# Altium PCB AEKISO60.PcbDoc (part 2 of 2)
Units mm, origin at the board's own origin, x right, y up, seen from the top; angles counter-clockwise.
Board outline 284.73 x 94.2 mm, 2 copper layers (Component Side, Bottom Layer), stack 1.571 mm thick; 190 components, 126 nets, 646 pads, 163 vias.
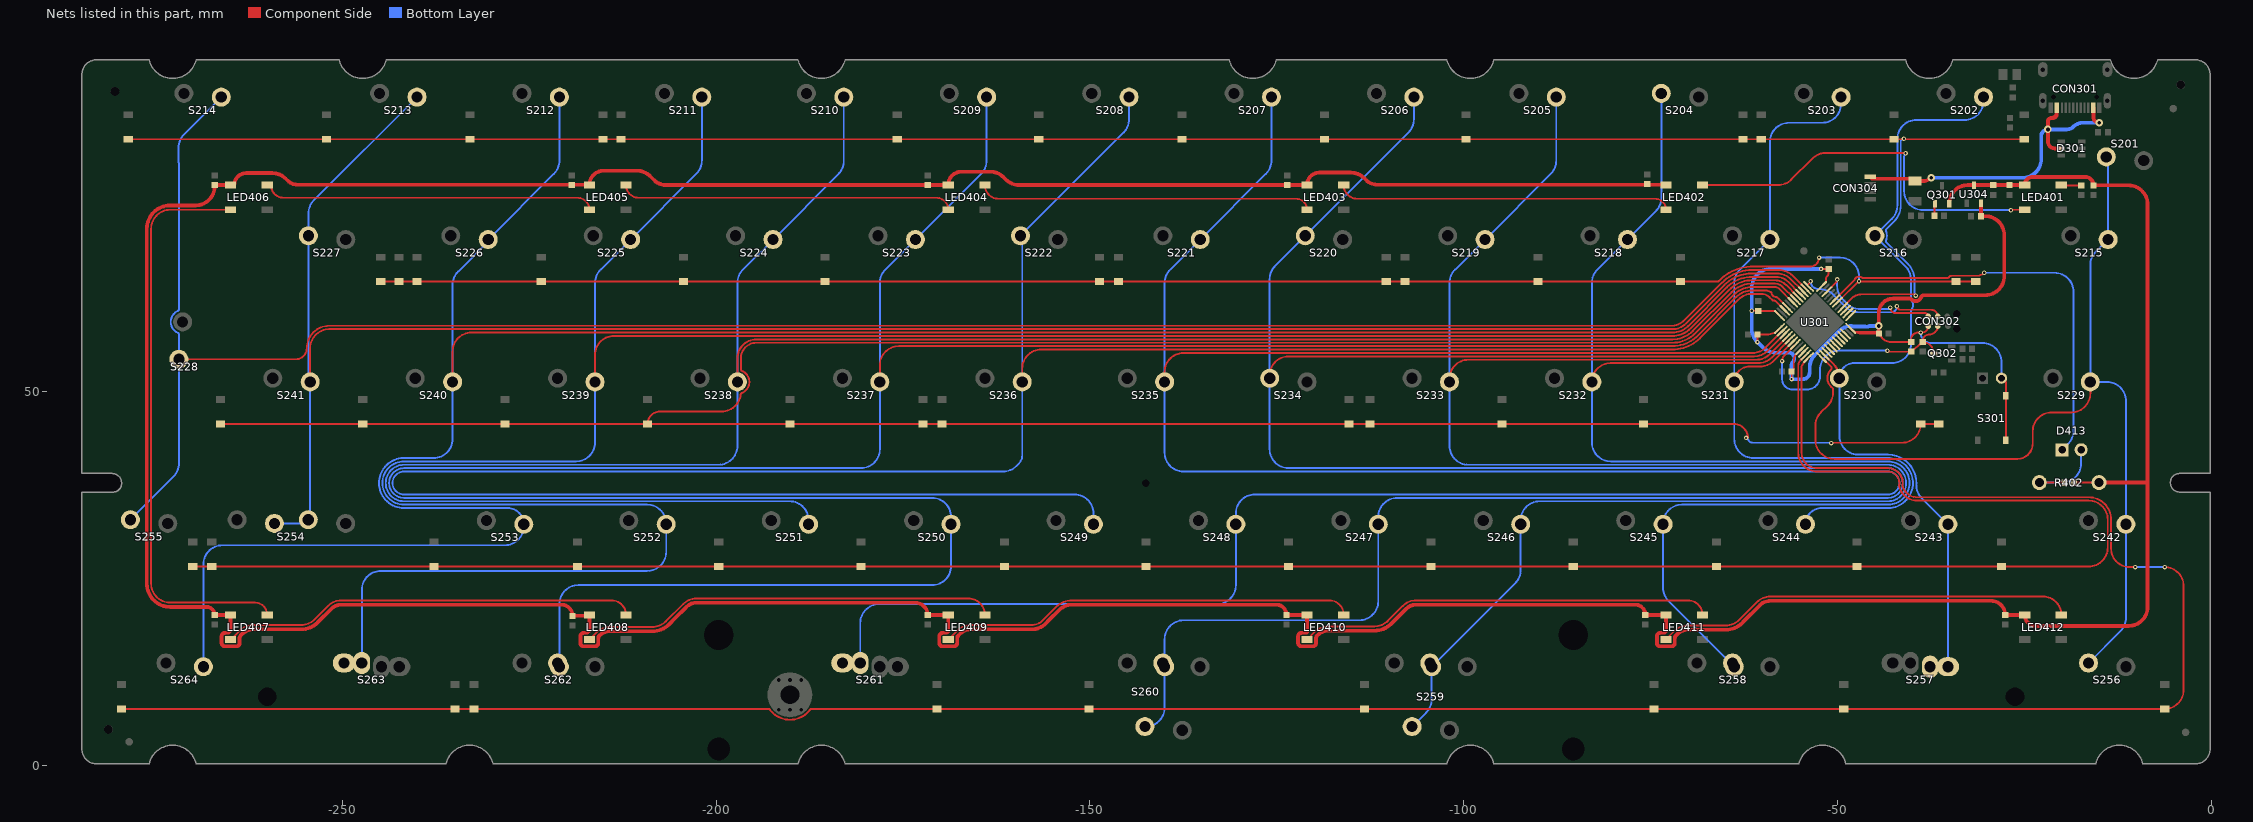
[diagram p2: the nets of this part, all layers, seen from the top]

## Via types
v1: diameter 0.6, hole 0.3, Component Side to Bottom Layer, tented both sides, 133 vias
v2: diameter 0.6, hole 0.3, Component Side to Bottom Layer, tented bottom, 25 vias
v3: diameter 1, hole 0.5, Component Side to Bottom Layer, tented both sides, 5 vias

## Nets (pads, with @x,y where several pads share a name; then routed paths per layer and width w, separated by ;. In a path a pad name is that pad's centre, name@x,y a point inside that pad or via, vN(x,y) a via of type N, cw(c..) or ccw(c..) an arc to the next point about the centre after c; other vN are vias at no path point) (continued)
NetD413_1: D413.1 R402.1 | length 12.2
  Component Side w0.254: R402.1@-23,37.846 R402.1@-19.65,37.846
  Bottom Layer w0.254: R402.1@-23,37.846 -19.945,37.846 ccw(c-19.945,40.386) -17.405,40.386 D413.1@-17.405,42.235
NetLED401_2: LED401.2 LED402.4 | length 51.2
  Component Side w0.254: LED402.4@-68.049,77.65 -57.949,77.65 ccw(c-57.949,80.19) -56.153,78.394 -53.423,81.124 cw(c-51.218,78.921) -52.278,81.852 cw(c-51.916,80.838) -51.913,81.915 v1(-40.894,81.915) ; v1@-26.598,74.35 LED401.2@-24.95,74.35
  Bottom Layer w0.254: v1(-40.894,81.915) ccw(c-40.457,81.478) -41.075,81.478 -41.075,76.835 ccw(c-38.535,76.835) -38.535,74.295 v1(-26.797,74.295)
NetLED401_4: LED401.4 R401.2 | length 2.7
  Component Side w0.254: LED401.4@-20.05,77.65 ccw(c-20.011,77.65) -20.011,77.612 R401.2@-17.399,77.612
NetLED402_2: LED402.2 LED403.4 | length 45
  Component Side w0.254: LED403.4@-116.049,77.65 ccw(c-114.218,77.65) -114.218,75.819 -74.418,75.819 cw(c-74.418,74.35) LED402.2@-72.949,74.35
NetLED403_2: LED403.2 LED404.4 | length 45
  Component Side w0.254: LED404.4@-164.049,77.65 ccw(c-162.218,77.65) -162.218,75.819 -122.418,75.819 cw(c-122.418,74.35) LED403.2@-120.949,74.35
NetLED404_2: LED404.2 LED405.4 | length 45
  Component Side w0.254: LED405.4@-212.049,77.65 ccw(c-210.346,77.65) -210.346,75.946 -170.545,75.946 cw(c-170.545,74.35) LED404.2@-168.949,74.35
NetLED405_2: LED405.2 LED406.4 | length 44.5
  Component Side w0.254: LED406.4@-259.55,77.65 ccw(c-257.846,77.65) -257.846,75.946 -218.545,75.946 cw(c-218.545,74.35) LED405.2@-216.95,74.35
NetLED406_2: LED406.2 LED407.4 | length 78
  Component Side w0.254: LED406.2@-264.45,74.35 LED406.2@-264.949,74.35 -273.029,74.35 ccw(c-273.029,71.81) -275.569,71.81 -275.569,24.328 ccw(c-273.029,24.328) -273.029,21.788 -261.687,21.788 cw(c-261.687,20.15) LED407.4@-260.049,20.15
NetLED407_2: LED407.2 LED408.4 | length 55.9
  Component Side w0.254: LED407.2@-264.949,16.85 -263.747,18.052 cw(c-261.951,16.256) -261.951,18.796 -255.51,18.796 ccw(c-255.51,21.336) -253.714,19.54 -251.899,21.354 cw(c-250.103,19.558) -250.103,22.098 -213.997,22.098 cw(c-213.997,20.15) LED408.4@-212.049,20.15
NetLED408_2: LED408.2 LED409.4 | length 56.1
  Component Side w0.254: LED408.2@-216.95,16.85 -216.005,17.795 cw(c-214.209,15.999) -214.209,18.539 -212.219,18.539 cw(c-212.076,15.548) -212.076,18.542 -208.52,18.542 ccw(c-208.52,21.082) -206.724,19.286 -204.401,21.608 ; -204.401,21.609 cw(c-204.223,21.427) -204.375,21.631 -203.985,21.922 ; -203.985,21.922 cw(c-202.692,20.193) -202.692,22.352 -166.251,22.352 cw(c-166.251,20.15) LED409.4@-164.049,20.15
NetLED409_2: LED409.2 LED410.4 | length 55.9
  Component Side w0.254: LED409.2@-168.949,16.85 -167.747,18.052 cw(c-165.951,16.256) -165.951,18.796 -157.793,18.796 ccw(c-157.793,20.882) -156.953,18.973 ccw(c-157.793,20.882) -156.319,19.406 -155.648,20.077 -154.504,21.22 cw(c-152.386,19.104) -154.053,21.591 cw(c-152.386,19.104) -152.386,22.098 -117.997,22.098 cw(c-117.997,20.15) LED410.4@-116.049,20.15
NetLED410_2: LED410.2 LED411.4 | length 55.9
  Component Side w0.254: LED410.2@-120.949,16.85 -119.93,17.869 cw(c-118.134,16.073) -118.134,18.613 -111.929,18.613 ccw(c-111.929,21.153) -110.133,19.357 -108.135,21.354 cw(c-106.339,19.558) -106.339,22.098 -69.997,22.098 cw(c-69.997,20.15) LED411.4@-68.049,20.15
NetLED411_2: LED411.2 LED412.4 | length 56.4
  Component Side w0.254: LED411.2@-72.949,16.85 -71.803,17.996 cw(c-70.007,16.2) -70.007,18.74 -64.939,18.74 ccw(c-64.939,21.28) -63.143,19.484 -60.764,21.862 cw(c-58.968,20.066) -58.968,22.606 -22.505,22.606 cw(c-22.505,20.15) LED412.4@-20.05,20.15
NetQ301_1: Q301.1 R307.1 | length 1.6
  Component Side w0.254: R307.1@-37.029,73.561 -37.029,74.96 cw(c-36.753,74.96) Q301.1@-36.948,75.155
NRST: C310.1 CON302.3 Q302.3 R303.2 U301.7 | length 34.2
  Component Side w0.254: v1(-57.404,54.102) cw(c-56.302,54.102) -57.081,54.881 U301.7@-55.797,56.166 ; v1(-43.307,55.499) ccw(c-42.964,55.842) -42.964,55.357 R303.2@-40.132,55.357 -39.834,55.63 -38.906,56.384 C310.1@-38.608,56.657 ; Q302.3@-37.141,55.118 -37.141,55.19 ccw(c-38.608,55.19) C310.1@-38.608,56.657 ; CON302.3@-36.576,58.801 cw(c-37.719,58.801) -37.719,57.658 ccw(c-37.719,56.769) -38.608,56.769 C310.1@-38.608,56.657
  Bottom Layer w0.254: v1(-57.404,54.102) -57.404,51.689 ccw(c-56.007,51.689) -56.007,50.292 -54.102,50.292 ccw(c-54.102,52.07) -52.324,52.07 -52.324,52.959 cw(c-49.784,52.959) -49.784,55.499 v1(-43.307,55.499)
PA0: U301.10
PA1: D242.2 D243.2 D244.2 D245.2 D246.2 D247.2 D248.2 D249.2 D250.2 D251.2 D252.2 D253.2 D254.2 D255.2 U301.11 | length 321.1
  Component Side w0.254: D255.2@-270.002,26.63 D254.2@-267.462,26.63 D253.2@-237.744,26.63 D252.2@-218.567,26.63 D251.2@-199.644,26.63 D250.2@-180.594,26.63 D249.2@-161.417,26.63 D248.2@-142.494,26.63 D247.2@-123.444,26.63 D246.2@-104.394,26.63 D245.2@-85.344,26.63 D244.2@-66.167,26.63 D243.2@-47.371,26.63 D242.2@-28.067,26.63 -16.383,26.63 ccw(c-16.383,29.17) -13.843,29.17 -13.843,32.893 ccw(c-16.383,32.893) -16.383,35.433 -39.354,35.433 cw(c-39.354,37.859) -41.743,37.437 cw(c-41.492,37.479) -41.742,37.524 ccw(c-43.25,37.79) -41.721,37.862 ccw(c-43.25,37.79) -43.25,39.321 -52.705,39.321 cw(c-52.705,41.861) -55.245,41.861 -55.245,53.469 cw(c-54.231,53.469) -54.949,54.185 ; -54.948,54.186 U301.11@-54.383,54.751
PA2: D256.2 D257.2 D258.2 D259.2 D260.2 D261.2 D262.2 D263.2 D264.2 U301.12 | length 367.9
  Component Side w0.254: D264.2@-279.527,7.58 D263.2@-234.95,7.58 D262.2@-232.41,7.58 -193.001,7.58 cw(c-193.002,7.326) -192.798,7.477 ccw(c-190.119,9.45) -187.441,7.476 cw(c-187.236,7.326) -187.237,7.58 D261.2@-170.434,7.58 D260.2@-150.114,7.58 D259.2@-113.284,7.58 D258.2@-74.549,7.58 D257.2@-49.149,7.58 D256.2@-6.223,7.58 ccw(c-6.223,10.12) -3.683,10.12 -3.683,24.003 ccw(c-6.223,24.003) v1(-6.223,26.543) ; U301.12@-54.029,54.398 -54.405,54.022 cw(c-54.638,54.123) -54.438,53.966 ccw(c-52.451,52.384) -54.77,53.42 ccw(c-54.537,53.319) -54.791,53.32 -54.791,41.861 ccw(c-52.705,41.861) -52.705,39.775 -43.25,39.775 cw(c-43.25,37.79) -41.283,37.522 ccw(c-41.031,37.489) -41.28,37.439 ccw(c-39.354,37.859) -39.354,35.887 -16.383,35.887 cw(c-16.383,32.893) -13.389,32.893 -13.389,29.01 ccw(c-10.922,29.01) -10.922,26.543 v1(-10.16,26.543)
  Bottom Layer w0.254: v1(-10.16,26.543) v1(-6.223,26.543)
PA3: S201.2 S215.1 S229.1 S242.1 S256.1 U301.13 | length 132.3
  Component Side w0.254: U301.13@-51.943,54.398 -51.926,54.381 -51.92,54.388 cw(c-52.032,54.16) -51.852,54.339 -51.52,54.008 ccw(c-51.183,54.345) -51.425,53.934 cw(c-51.555,53.716) -51.376,53.896 -50.83,53.35 cw(c-51.01,53.171) -50.836,52.986 ccw(c-49.75,51.815) -51.197,51.14 ccw(c-49.75,51.815) -50.686,50.521 cw(c-50.836,50.316) -50.582,50.317 -50.582,49.886 cw(c-53.061,49.886) -51.308,48.133 -52.215,47.226 ccw(c-50.419,45.43) -52.959,45.43 -52.959,43.561 ccw(c-50.419,43.561) -50.419,41.021 -25.908,41.021 ccw(c-25.908,43.053) -23.876,43.053 -23.876,44.704 cw(c-21.336,44.704) -21.336,47.244 -18.715,47.244 ccw(c-18.715,49.784) -16.175,49.784 S229.1@-16.175,51.315
  Bottom Layer w0.254: S256.1@-16.412,13.715 -12.156,17.972 ccw(c-13.952,19.768) -11.412,19.768 S242.1@-11.412,32.265 -11.412,48.775 ccw(c-13.952,48.775) -13.952,51.315 S229.1@-16.175,51.315 -16.175,66.931 cw(c-13.635,66.931) -15.431,68.727 S215.1@-13.793,70.365 -13.793,80.84 ccw(c-14.606,80.84) S201.2@-14.031,81.415
PA4: S202.2 S216.2 S230.2 S243.2 S257.1 U301.14 | length 109.1
  Component Side w0.254: U301.14@-51.589,54.751 -50.494,53.656 cw(c-52.29,51.86) -50.187,53.285 cw(c-52.29,51.86) -49.75,51.86 S230.2@-49.75,51.815
  Bottom Layer w0.254: -40.161,62.935 ccw(c-39.537,62.873) -40.162,62.933 ccw(c-39.537,62.873) -40.161,62.811 -40.161,62.419 ccw(c-39.907,62.42) -40.112,62.269 cw(c-41.021,61.595) -40.111,60.922 ccw(c-39.906,60.772) -40.16,60.773 -40.16,56.388 cw(c-42.7,56.388) -42.7,53.848 -47.717,53.848 ccw(c-47.717,51.815) S230.2@-49.75,51.815 -49.75,44.131 ccw(c-47.21,44.131) -49.674,43.513 ccw(c-47.21,44.131) -47.828,41.667 ccw(c-47.21,44.131) -47.21,41.591 -44.069,41.591 -43.25,41.591 cw(c-43.25,37.79) -43.246,41.591 cw(c-43.25,37.79) -41.516,41.173 cw(c-43.25,37.79) -40.032,39.814 cw(c-43.25,37.79) -39.449,37.794 cw(c-43.25,37.79) -39.449,37.786 cw(c-43.25,37.79) -39.454,37.603 ccw(c-39.2,37.591) -39.449,37.541 ccw(c-36.909,37.541) -38.705,35.745 S243.2@-35.225,32.265 S257.1@-35.224,13.215 ; -40.16,62.957 -40.16,64.986 ccw(c-42.7,64.986) -40.904,66.782 S216.2@-44.987,70.865 -42.727,73.125 ccw(c-44.523,74.921) -42.168,73.969 ccw(c-44.523,74.921) -41.983,74.921 -41.983,83.82 cw(c-39.443,83.82) -39.443,86.36 -33.002,86.36 ccw(c-33.002,88.9) -30.462,88.9 S202.2@-30.462,89.415
PA5: U301.15
PA6: U301.16
PA7: U301.17
PA9: D215.2 D216.2 D217.2 D218.2 D219.2 D220.2 D221.2 D222.2 D223.2 D224.2 D225.2 D226.2 D227.2 D228.2 U301.30 | length 220.8
  Component Side w0.254: D228.2@-244.856,64.73 D227.2@-242.443,64.73 D226.2@-240.03,64.73 D225.2@-223.393,64.73 D224.2@-204.343,64.73 D223.2@-185.42,64.73 D222.2@-148.717,64.73 D221.2@-146.177,64.73 D220.2@-110.363,64.73 D219.2@-107.823,64.73 D218.2@-90.043,64.73 -71.386,64.73 ccw(c-71.386,65.165) -71.096,64.841 ccw(c-71.386,65.165) -71.006,64.953 cw(c-72.929,64.73) D217.2@-70.993,64.73 -66.065,64.73 ccw(c-66.065,64.984) -65.886,64.804 -65.772,64.918 cw(c-61.402,60.56) -64.191,66.066 cw(c-61.402,60.56) -62.375,66.655 ccw(c-62.416,66.905) -62.365,66.657 cw(c-61.648,63.284) -61.648,66.732 -53.664,66.732 ccw(c-53.664,67.945) v1(-52.451,67.945) ; U301.30@-49.822,62.141 -49.809,62.141 -47.18,64.77 v1(-47.117,64.77) -34.203,64.77 D216.2@-34.163,64.73 D215.2@-31.496,64.73
  Bottom Layer w0.254: v1(-52.451,67.945) -49.657,67.945 cw(c-49.657,65.405) -47.117,65.405 v1(-47.117,64.77)
PA10: D413.2 U301.31 | length 56.3
  Component Side w0.254: U301.31@-50.175,62.494 -47.784,64.886 ccw(c-47.964,65.065) -47.731,64.964 -47.689,65.06 cw(c-47.456,64.958) -47.637,65.137 ccw(c-47.788,65.341) -47.595,65.176 cw(c-47.117,64.77) -47.561,65.213 cw(c-47.117,64.77) -46.743,65.273 ccw(c-46.593,65.478) -46.594,65.224 -35.274,65.224 ccw(c-35.275,65.478) -35.056,65.349 cw(c-34.773,65.185) -34.773,65.512 -32.135,65.512 cw(c-32.135,65.147) -32.125,65.512 ccw(c-32.12,65.766) -32.113,65.512 cw(c-32.106,65.185) -32.106,65.512 -31.321,65.512 ccw(c-31.321,66.881) -30.697,65.662 ccw(c-31.321,66.881) v1(-30.353,65.913)
  Bottom Layer w0.254: v1(-30.353,65.913) -20.955,65.913 cw(c-20.955,63.373) -18.415,63.373 -18.415,44.817 cw(c-20.955,44.817) -19.159,43.021 D413.2@-19.945,42.235
PA15: S214.2 S228.2 S255.2 U301.38 | length 285.9
  Component Side w0.254: S228.2@-271.861,54.345 -256.238,54.345 ccw(c-256.238,55.829) -254.754,55.829 cw(c-251.76,55.829) -251.76,58.823 -72.277,58.823 ccw(c-72.277,61.363) -70.481,59.567 -65.451,64.597 cw(c-61.402,60.56) -65.439,64.609 cw(c-61.402,60.56) -62.292,66.208 ccw(c-62.333,66.459) -62.281,66.21 cw(c-61.648,63.284) -61.648,66.278 -57.804,66.278 cw(c-57.804,63.738) -56.008,65.534 U301.38@-54.383,63.908
  Bottom Layer w0.254: S255.2@-278.35,32.885 -272.605,38.63 ccw(c-274.401,40.426) -271.861,40.426 S228.2@-271.861,54.345 -271.861,57.653 ccw(c-272.115,57.655) -272.012,57.887 cw(c-271.361,59.345) -272.012,60.803 ccw(c-272.115,61.035) -271.861,61.037 -271.861,80.599 ccw(c-271.907,80.599) -271.907,80.645 -271.907,82.648 cw(c-269.367,82.648) -271.163,84.444 S214.2@-266.192,89.415
PB0: U301.18
PB1: U301.19
PB2: U301.20
PB3: S213.1 S227.2 S241.1 S254.2 U301.39 | length 276.6
  Component Side w0.254: S241.1@-254.3,51.315 -254.3,55.829 cw(c-251.76,55.829) -251.76,58.369 -72.089,58.369 ccw(c-72.089,60.909) -70.293,59.113 -65.129,64.277 cw(c-61.402,60.56) -65.119,64.287 cw(c-61.402,60.56) -62.209,65.762 ccw(c-62.25,66.012) -62.196,65.764 cw(c-61.648,63.284) -61.648,65.824 -58.057,65.824 cw(c-58.057,63.284) -56.261,65.08 U301.39@-54.736,63.555
  Bottom Layer w0.254: S254.2@-259.08,32.385 -255.055,32.385 ccw(c-255.055,32.885) S254.2@-254.555,32.885 ccw(c-254.555,33.14) -254.3,33.14 S241.1@-254.3,51.315 cw(c-253.728,51.887) -254.537,51.887 S227.2@-254.537,70.865 -254.537,73.838 cw(c-251.997,73.838) -253.793,75.634 S213.1@-240.012,89.415
PB4: S212.2 S226.2 S240.2 S253.1 S264.2 U301.40 | length 336.1
  Component Side w0.254: S240.2@-235.25,51.315 -235.25,55.375 cw(c-232.71,55.375) -232.71,57.915 -72.089,57.915 ccw(c-72.089,60.909) -69.973,58.791 ccw(c-72.089,60.909) -69.971,58.793 -64.807,63.957 cw(c-61.402,60.56) -64.798,63.966 cw(c-61.402,60.56) -61.402,65.37 -58.208,65.37 cw(c-58.208,63.077) -56.587,64.698 U301.40@-55.09,63.201
  Bottom Layer w0.254: S264.2@-268.587,13.215 -268.587,26.924 cw(c-266.047,26.924) -266.047,29.464 -228.265,29.464 ccw(c-228.265,32.004) -225.725,32.004 S253.1@-225.725,32.265 ccw(c-227.903,32.265) -227.903,34.443 -241.29,34.443 -241.756,34.443 cw(c-241.75,37.79) -244.878,36.598 cw(c-241.75,37.79) -245.097,37.786 cw(c-241.75,37.79) -245.097,37.794 cw(c-241.75,37.79) -244.785,39.201 cw(c-241.75,37.79) -241.851,41.135 -241.805,41.137 cw(c-241.797,40.883) -241.797,41.137 -237.79,41.137 ccw(c-237.79,43.677) -235.25,43.677 S240.2@-235.25,51.315 -235.25,64.289 cw(c-232.71,64.289) -234.506,66.085 -230.487,70.104 S226.2@-230.487,70.365 -221.706,79.146 ccw(c-223.502,80.942) -220.962,80.942 S212.2@-220.962,89.415
PB5: S211.1 S225.1 S239.1 S252.2 S263.2 U301.41 | length 351
  Component Side w0.254: S239.1@-216.2,51.315 -216.2,54.921 cw(c-213.66,54.921) -213.66,57.461 -72.089,57.461 ccw(c-72.089,60.909) -69.653,58.469 ccw(c-72.089,60.909) -69.649,58.473 -64.485,63.637 cw(c-61.402,60.56) -64.478,63.644 cw(c-61.402,60.56) -61.402,64.916 -58.34,64.916 cw(c-58.34,63.072) -57.562,64.744 ccw(c-57.457,64.975) -57.558,64.742 cw(c-58.409,62.749) -56.877,64.282 ; -56.877,64.281 U301.41@-55.443,62.848
  Bottom Layer w0.254: S263.2@-247.393,13.715 -247.393,23.495 cw(c-244.853,23.495) -244.853,26.035 -209.215,26.035 ccw(c-209.215,28.575) -206.675,28.575 S252.2@-206.675,32.265 -206.675,32.357 ccw(c-209.215,32.357) -209.215,34.897 -239.141,34.897 -241.755,34.897 cw(c-241.75,37.79) -243.642,35.602 cw(c-241.75,37.79) -244.643,37.786 cw(c-241.75,37.79) -244.643,37.794 cw(c-241.75,37.79) -241.754,40.683 cw(c-241.75,37.79) -241.75,40.683 -239.395,40.683 -218.74,40.683 ccw(c-218.74,43.223) -216.2,43.223 S239.1@-216.2,51.315 -216.2,64.55 cw(c-213.66,64.55) -215.456,66.346 S225.1@-211.437,70.365 -202.656,79.146 ccw(c-204.452,80.942) -201.912,80.942 S211.1@-201.912,89.415
PB6: S210.2 S224.2 S238.2 S251.2 U301.42 | length 311.6
  Component Side w0.254: S238.2@-197.15,51.315 -197.15,54.467 cw(c-194.61,54.467) -194.61,57.007 -72.089,57.007 ccw(c-72.089,60.909) -69.333,58.147 ccw(c-72.089,60.909) -69.327,58.153 -64.164,63.316 cw(c-61.402,60.56) -64.158,63.322 cw(c-61.402,60.56) -61.402,64.462 -58.34,64.462 cw(c-58.34,63.072) -57.357,64.055 U301.42@-55.797,62.494
  Bottom Layer w0.254: S251.2@-187.625,32.265 -187.625,32.811 ccw(c-190.165,32.811) -190.165,35.351 -240.411,35.351 -241.757,35.351 cw(c-241.75,37.79) -244.189,37.786 cw(c-241.75,37.79) -244.189,37.794 cw(c-241.75,37.79) -241.754,40.229 cw(c-241.75,37.79) -241.75,40.229 -239.141,40.229 -199.69,40.229 ccw(c-199.69,42.769) -197.15,42.769 S238.2@-197.15,51.315 -197.15,64.55 cw(c-194.61,64.55) -196.406,66.346 S224.2@-192.387,70.365 -183.664,79.088 ccw(c-185.46,80.884) -182.92,80.884 S210.2@-182.92,89.415
PB7: D229.2 D230.2 D231.2 D232.2 D233.2 D234.2 D235.2 D236.2 D237.2 D238.2 D239.2 D240.2 D241.2 U301.43 | length 398.3
  Component Side w0.254: D241.2@-266.319,45.68 D240.2@-247.269,45.68 D239.2@-228.219,45.68 D238.2@-209.169,45.68 ; v1@-61.976,43.815 ccw(c-63.841,43.815) -63.841,45.68 D231.2@-75.946,45.68 D232.2@-94.869,45.68 D233.2@-112.522,45.68 D234.2@-115.316,45.68 D235.2@-169.799,45.68 D236.2@-172.339,45.68 D237.2@-190.119,45.68 D238.2@-209.169,45.68 ; U301.43@-56.15,62.141 -57.774,63.765 ccw(c-58.362,63.177) -58.362,64.008 -61.402,64.008 ccw(c-61.402,60.56) -63.838,63 ccw(c-61.402,60.56) -63.842,62.996 -69.005,57.832 cw(c-72.089,60.909) -69.013,57.825 cw(c-72.089,60.909) -72.089,56.553 -194.61,56.553 ccw(c-194.61,54.467) -196.392,55.551 ccw(c-194.61,54.467) -196.696,54.467 -196.696,53.467 -196.696,53.025 ccw(c-196.442,53.025) -196.539,52.791 cw(c-197.15,51.315) -196.554,49.833 ccw(c-196.46,49.598) -196.712,49.626 cw(c-199.236,49.911) -199.236,47.371 -207.478,47.371 ccw(c-207.478,45.68) D238.2@-209.169,45.68 ; v1@-50.673,43.18 -41.362,43.18 ccw(c-41.362,45.68) D230.2@-38.862,45.68 D229.2@-36.449,45.68
  Bottom Layer w0.254: v1@-61.976,43.815 ccw(c-61.341,43.815) -61.341,43.18 v1@-50.673,43.18
  other v1: -50.842,43.143 -62.23,43.815
PB8: S209.1 S223.1 S237.2 S250.2 S262.2 U301.45 | length 397.6
  Component Side w0.254: S237.2@-178.1,51.315 -178.1,53.559 cw(c-175.56,53.559) -175.56,56.099 -72.089,56.099 ccw(c-72.089,60.909) -68.692,57.503 ccw(c-72.089,60.909) -68.683,57.512 -63.519,62.676 cw(c-61.402,60.56) -63.518,62.678 cw(c-61.402,60.56) -61.402,63.554 -59.777,63.554 cw(c-59.777,61.635) -59.268,63.485 cw(c-59.777,61.635) -58.956,63.369 cw(c-59.065,63.14) -58.816,63.188 ccw(c-58.199,63.303) -58.644,62.86 ccw(c-58.199,63.303) -58.642,62.859 ccw(c-58.199,63.303) -58.203,62.676 ; -58.202,62.676 cw(c-58.205,62.422) -58.026,62.602 -57.847,62.423 U301.45@-56.857,61.434
  Bottom Layer w0.254: S262.2@-220.962,13.215 -220.962,21.59 cw(c-218.422,21.59) -218.422,24.13 -171.115,24.13 ccw(c-171.115,26.67) -168.575,26.67 S250.2@-168.575,32.265 -168.575,33.265 ccw(c-171.115,33.265) -171.115,35.805 -240.03,35.805 -241.755,35.805 cw(c-241.75,37.79) -243.735,37.787 cw(c-241.75,37.79) -243.735,37.793 cw(c-241.75,37.79) -241.753,39.775 cw(c-241.75,37.79) -241.75,39.775 -239.776,39.775 -180.64,39.775 ccw(c-180.64,42.315) -178.1,42.315 S237.2@-178.1,51.315 -178.1,64.55 cw(c-175.56,64.55) -177.356,66.346 S223.1@-173.337,70.365 -164.556,79.146 ccw(c-166.352,80.942) -163.812,80.942 S209.1@-163.812,89.415
PB9: S208.2 S222.2 S236.1 S249.2 U301.46 | length 346.2
  Component Side w0.254: S236.1@-159.05,51.315 -159.05,53.105 cw(c-156.51,53.105) -156.51,55.645 -72.089,55.645 ccw(c-72.089,60.909) -68.372,57.182 ccw(c-72.089,60.909) -68.362,57.192 -63.198,62.356 cw(c-61.402,60.56) -61.402,63.1 -60.17,63.1 cw(c-60.17,61.601) -59.11,62.661 -58.671,62.222 cw(c-58.671,61.455) -58.128,61.997 U301.46@-57.211,61.08
  Bottom Layer w0.254: S249.2@-149.525,32.265 -149.525,33.719 ccw(c-152.065,33.719) -152.065,36.259 -241.753,36.259 cw(c-241.75,37.79) -241.753,39.321 cw(c-241.75,37.79) -241.75,39.321 -240.538,39.321 -161.629,39.321 ccw(c-161.629,41.861) -159.833,40.065 -159.512,40.386 ccw(c-160.627,41.501) -159.05,41.501 S236.1@-159.05,51.315 -159.05,70.293 ccw(c-159.859,70.293) S222.2@-159.287,70.865 -145.506,84.646 ccw(c-147.302,86.442) -144.762,86.442 S208.2@-144.762,89.415
PB10: U301.21
PB11: U301.22
PB12: U301.25
PB13: U301.26
PB14: U301.27
PB15: D201.2 D202.2 D203.2 D204.2 D205.2 D206.2 D207.2 D208.2 D209.2 D210.2 D211.2 D212.2 D213.2 D214.2 U301.28 | length 287.4
  Component Side w0.254: D214.2@-278.638,83.78 D213.2@-252.095,83.78 D212.2@-232.918,83.78 D210.2@-215.138,83.78 D211.2@-212.725,83.78 D209.2@-175.768,83.78 D208.2@-156.845,83.78 D207.2@-137.668,83.78 D206.2@-118.618,83.78 D205.2@-99.695,83.78 D204.2@-62.611,83.78 D203.2@-60.198,83.78 D202.2@-42.418,83.78 D201.2@-25.019,83.78 ; U301.28@-49.115,61.434 -49.098,61.45 -49.105,61.456 cw(c-48.877,61.345) -49.057,61.524 -47.956,62.624 cw(c-47.778,62.444) -47.928,62.649 cw(c-46.703,60.96) -46.703,63.046 -39.71,63.046 cw(c-39.71,62.873) v1(-39.537,62.873)
  Bottom Layer w0.254: v1(-41.104,83.831) ccw(c-41.104,83.153) -41.378,83.774 ccw(c-41.275,83.541) -41.529,83.543 -41.529,74.921 cw(c-44.523,74.921) -41.554,74.536 cw(c-44.523,74.921) -42.359,72.852 cw(c-44.523,74.921) -42.407,72.803 -43.458,71.752 ccw(c-43.277,71.574) -43.512,71.477 cw(c-44.987,70.865) -43.512,70.252 ccw(c-43.277,70.156) -43.458,69.978 -41.54,68.061 -40.584,67.104 cw(c-42.7,64.986) -39.706,64.986 -39.706,63.111 ccw(c-39.452,63.112) v1(-39.537,62.873)
PC13: S207.1 S221.1 S235.2 S248.2 S261.2 U301.2 | length 399.1
  Component Side w0.254: S235.2@-140,51.315 -140,52.651 cw(c-137.46,52.651) -137.46,55.191 -61.359,55.191 ccw(c-61.359,57.731) -59.563,55.935 U301.2@-57.565,57.933
  Bottom Layer w0.254: S261.2@-180.718,13.715 -180.718,19.05 cw(c-178.178,19.05) -178.178,21.59 -133.015,21.59 ccw(c-133.015,24.13) -130.475,24.13 S248.2@-130.475,32.265 -130.475,33.719 cw(c-127.935,33.719) -127.935,36.259 -43.25,36.259 ccw(c-43.25,37.79) -43.001,39.301 ccw(c-43.25,37.79) -43.003,39.301 ccw(c-43.25,37.79) -43.247,39.321 ccw(c-43.25,37.79) -43.25,39.321 -44.323,39.321 -137.46,39.321 cw(c-137.46,41.861) -140,41.861 S235.2@-140,51.315 -140,64.55 cw(c-137.46,64.55) -139.256,66.346 S221.1@-135.237,70.365 ; S221.1@-135.12,70.482 -126.456,79.146 ccw(c-128.252,80.942) -125.712,80.942 S207.1@-125.712,89.415
PC14: S206.2 S220.2 S234.1 S247.1 S260.1 U301.3 | length 342.2
  Component Side w0.254: S234.1@-125.95,51.815 -125.95,52.197 cw(c-123.41,52.197) -123.41,54.737 -61.138,54.737 ccw(c-61.138,57.277) -59.342,55.481 U301.3@-57.412,57.412
  Bottom Layer w0.254: S260.1@-142.641,5.215 -142.539,5.215 ccw(c-142.539,7.755) -139.999,7.755 S260.1@-139.999,13.215 -139.999,16.891 cw(c-137.459,16.891) -137.459,19.431 -113.965,19.431 ccw(c-113.965,21.971) -111.425,21.971 S247.1@-111.425,32.265 -111.425,33.265 cw(c-108.885,33.265) -108.885,35.805 -43.25,35.805 ccw(c-43.25,37.79) -41.265,37.787 ccw(c-43.25,37.79) -41.265,37.793 ccw(c-43.25,37.79) -43.247,39.775 ccw(c-43.25,37.79) -43.25,39.775 -44.704,39.775 -123.41,39.775 cw(c-123.41,42.315) -125.95,42.315 S234.1@-125.95,51.815 -125.95,65.05 cw(c-123.41,65.05) -125.206,66.846 S220.2@-121.187,70.865 -107.406,84.646 ccw(c-109.202,86.442) -106.662,86.442 S206.2@-106.662,89.415
PC15: S205.1 S219.1 S233.1 S246.2 S259.1 U301.4 | length 252.1
  Component Side w0.254: S233.1@-101.9,51.315 -101.9,51.743 cw(c-99.36,51.743) -99.36,54.283 -60.853,54.283 ccw(c-60.853,56.823) -59.057,55.027 U301.4@-56.857,57.226
  Bottom Layer w0.254: S259.1@-106.899,5.215 -105.025,7.09 ccw(c-106.821,8.886) -104.281,8.886 S259.1@-104.281,13.215 -93.119,24.377 ccw(c-94.915,26.173) -92.375,26.173 S246.2@-92.375,32.265 -92.375,32.811 cw(c-89.835,32.811) -89.835,35.351 -43.25,35.351 ccw(c-43.25,37.79) -40.811,37.786 ccw(c-43.25,37.79) -40.811,37.794 ccw(c-43.25,37.79) -43.246,40.229 ccw(c-43.25,37.79) -43.25,40.229 -44.45,40.229 -99.36,40.229 cw(c-99.36,42.769) -101.9,42.769 S233.1@-101.9,51.315 -101.9,64.55 cw(c-99.36,64.55) -101.156,66.346 S219.1@-97.137,70.365 -88.356,79.146 ccw(c-90.152,80.942) -87.612,80.942 S205.1@-87.612,89.415
PF0: S204.2 S218.2 S232.2 S245.1 S258.2 U301.5 | length 183.9
  Component Side w0.254: S232.2@-82.85,51.315 cw(c-80.336,51.315) -80.336,53.829 -60.6,53.829 ccw(c-60.6,56.369) -58.804,54.573 U301.5@-56.504,56.873
  Bottom Layer w0.254: S204.2@-73.562,89.915 -73.562,75.942 cw(c-76.102,75.942) -74.306,74.146 S218.2@-78.087,70.365 -82.106,66.346 ccw(c-80.31,64.55) -82.85,64.55 S232.2@-82.85,51.315 -82.85,43.223 ccw(c-80.31,43.223) -80.31,40.683 -44.196,40.683 -43.25,40.683 cw(c-43.25,37.79) -43.246,40.683 cw(c-43.25,37.79) -40.357,37.794 cw(c-43.25,37.79) -40.357,37.786 cw(c-43.25,37.79) -43.176,34.898 ; S258.2@-63.799,13.215 -72.581,21.997 cw(c-70.785,23.793) -73.325,23.793 S245.1@-73.325,32.265 -73.325,32.357 cw(c-70.785,32.357) -70.785,34.897 -43.176,34.897
PF1: S203.1 S217.1 S231.1 S244.2 U301.6 | length 109.7
  Component Side w0.254: S231.1@-63.8,51.315 cw(c-61.74,51.315) -61.74,53.375 -60.347,53.375 ccw(c-60.347,55.915) -58.551,54.119 U301.6@-56.15,56.519
  Bottom Layer w0.254: S244.2@-54.275,32.265 cw(c-52.097,32.265) -52.097,34.443 -43.176,34.443 ccw(c-43.176,34.897) -43.138,34.445 cw(c-43.117,34.191) -43.127,34.445 ccw(c-43.25,37.79) -41.469,34.956 ccw(c-43.25,37.79) -40.139,36.555 ccw(c-43.25,37.79) -39.903,37.786 ccw(c-43.25,37.79) -39.903,37.794 ccw(c-43.25,37.79) -40.059,38.798 ccw(c-43.25,37.79) -41.37,40.559 ccw(c-43.25,37.79) -43.246,41.137 ccw(c-43.25,37.79) -43.25,41.137 -44.831,41.137 -61.26,41.137 cw(c-61.26,43.677) -63.8,43.677 S231.1@-63.8,51.315 -63.8,64.55 cw(c-61.26,64.55) -63.056,66.346 S217.1@-59.037,70.365 -59.037,83.439 cw(c-56.497,83.439) -56.497,85.979 -52.052,85.979 ccw(c-52.052,88.519) -49.512,88.519 S203.1@-49.512,89.415
RAW: CON301.A4B9 CON301.B4A9 CON304.1 D301.5 F301.2 | length 47
  Component Side w0.5: CON304.1@-45.625,78.75 -45.446,78.7 -45.446,78.569 ccw(c-45.192,79) -45.194,78.5 -44.85,78.5 cw(c-44.85,78.05) -44.772,78.493 ccw(c-44.688,78.986) -44.689,78.486 -40.274,78.486 F301.2@-39.624,78.185 -38.498,78.185 ccw(c-38.498,79.646) -37.824,78.35 ccw(c-38.498,79.646) v3(-37.465,78.613) ; -21.163,86.626 ccw(c-21.163,87.139) -20.65,87.139 CON301.B4A9@-20.65,87.345 ; CON301.B4A9@-20.65,88 CON301.B4A9@-20.65,87.345 ; D301.5@-20.298,82.55 -20.925,82.55 cw(c-20.925,83.469) -21.844,83.469 v3(-21.844,85.09) -21.844,86.151 cw(c-21.369,86.151) -21.369,86.626 ccw(c-21.369,87.345) -21.118,86.671 ccw(c-21.369,87.345) CON301.B4A9@-20.65,87.345 ; CON301.A4B9@-15.75,88 -15.75,86.743 ccw(c-14.986,86.743) v3(-14.986,85.979)
  Bottom Layer w0.5: v3(-37.465,78.613) -25.273,78.613 ccw(c-25.273,81.153) -22.733,81.153 -22.733,84.201 cw(c-21.844,84.201) v3(-21.844,85.09) -19.335,85.09 ccw(c-19.335,86.391) -18.415,85.471 cw(c-17.189,84.245) -17.695,85.904 cw(c-17.189,84.245) -17.189,85.979 v3(-14.986,85.979)
SWCLK: CON302.4 U301.37 | length 20.6
  Component Side w0.254: U301.37@-54.029,64.262 -53.646,64.645 ccw(c-53.77,64.77) v1(-53.594,64.77) ; v1(-42.037,61.432) ccw(c-41.573,61.432) -41.573,60.968 -37.473,60.968 cw(c-37.473,60.071) CON302.4@-36.576,60.071
  Bottom Layer w0.254: v1(-53.594,64.77) ccw(c-52.581,64.77) -52.581,63.757 -52.471,63.757 cw(c-52.471,60.94) -50.481,62.934 cw(c-52.471,60.94) -50.478,62.931 -49.328,61.781 -48.893,61.346 ccw(c-47.171,63.065) -48.89,61.343 ccw(c-47.171,63.065) -47.171,60.632 -42.837,60.632 ccw(c-42.837,61.432) -42.103,61.113 ccw(c-42.837,61.432) v1(-42.037,61.432)
SWDIO: CON302.2 U301.34 | length 17.6
  Component Side w0.254: U301.34@-51.236,63.555 -50.23,64.561 ccw(c-50.693,65.024) v1(-50.038,65.024) ; v1(-42.926,61.259) ccw(c-42.181,61.259) -42.181,60.514 -38.289,60.514 cw(c-38.289,60.071) CON302.2@-37.846,60.071 CON302.2@-37.991,60.071
  Bottom Layer w0.254: v1(-50.038,65.024) -50.038,64.185 ccw(c-47.498,64.185) -49.294,62.389 -48.57,61.666 ; -48.57,61.665 ccw(c-47.171,63.065) -47.171,61.086 -43.193,61.086 -43.02,61.259 v1(-42.926,61.259)
VCC: C307.2 C401.2 C402.2 C403.2 C404.2 C405.2 C406.2 C407.2 C408.2 C409.2 C410.2 C411.2 C412.2 LED401.1 LED402.1 LED403.1 LED404.1 LED405.1 LED406.1 LED407.1 LED408.1 LED409.1 LED410.1 LED411.1 LED412.1 Q301.2 R306.1 R402.2 U304.3 | length 675.8
  Component Side w0.254: R402.2@-18.35,37.846 R402.2@-15,37.846
  Component Side w0.5: LED406.1@-264.949,77.65 -264.949,77.653 C406.2@-267.086,77.653 -267.086,77.467 cw(c-269.626,77.467) -269.626,74.927 -273.029,74.927 ccw(c-273.029,71.81) -276.146,71.81 -276.146,24.328 ccw(c-273.029,24.328) -273.029,21.211 -268.146,21.211 cw(c-268.146,20.152) C407.2@-267.086,20.152 -264.949,20.152 LED407.1@-264.949,20.15 -264.949,18.25 cw(c-265.449,18.25) -265.449,17.75 -265.699,17.75 ccw(c-265.699,17.3) -266.149,17.3 -266.149,16.4 ccw(c-265.699,16.4) -265.699,15.95 -264.199,15.95 ccw(c-264.199,16.4) -263.749,16.4 -263.749,17.027 cw(c-263.249,17.027) -263.745,17.091 cw(c-263.249,17.027) -263.612,17.371 cw(c-263.249,17.027) -263.603,17.38 -263.34,17.643 cw(c-261.951,16.256) -262.515,18.136 cw(c-261.951,16.256) -261.951,18.219 -255.51,18.219 ccw(c-255.51,21.336) -253.304,19.133 -251.491,20.946 cw(c-250.103,19.558) -250.103,21.521 -220.704,21.521 cw(c-220.704,20.025) C408.2@-219.207,20.025 -217.075,20.025 ccw(c-217.075,20.15) LED408.1@-216.95,20.15 -216.95,18.25 cw(c-217.449,18.25) -217.449,17.75 -217.7,17.75 ccw(c-217.7,17.3) -218.15,17.3 -218.15,16.4 ccw(c-217.7,16.4) -217.7,15.95 -216.199,15.95 ccw(c-216.199,16.4) -215.749,16.4 -215.749,17.027 cw(c-215.25,17.027) -215.603,17.381 -215.596,17.387 cw(c-214.209,15.999) -214.209,17.962 -212.219,17.962 ccw(c-212.219,18.539) -212.193,17.962 cw(c-212.076,15.548) -212.076,17.965 -208.52,17.965 ccw(c-208.52,21.082) -206.316,18.878 -205.497,19.696 -204.036,21.157 cw(c-203.683,20.804) -203.982,21.204 -203.639,21.461 cw(c-202.692,20.193) -202.692,21.775 -173.333,21.775 cw(c-173.333,20.152) C409.2@-171.709,20.152 ; LED406.1@-264.5,77.7 cw(c-264.5,77.65) -264.45,77.65 cw(c-262.852,77.65) -262.852,79.248 -259.37,79.248 cw(c-259.37,76.708) -257.574,78.504 -257.302,78.232 ccw(c-256.018,79.516) -256.018,77.7 LED405.1@-216.95,77.7 ; LED405.1@-216.95,77.65 cw(c-215.026,77.65) -215.212,79.564 cw(c-215.188,79.311) -215.176,79.565 ccw(c-215.138,80.391) -215.032,79.571 cw(c-214.999,79.319) -214.998,79.573 -210.608,79.573 cw(c-210.608,77.033) -208.993,78.994 cw(c-210.608,77.033) -208.812,78.829 -208.285,78.303 ccw(c-206.709,79.879) -206.709,77.65 -170.45,77.65 ; C409.2@-171.709,20.15 LED409.1@-168.949,20.15 -168.949,17.927 -168.95,17.926 cw(c-169.331,18.25) -169.331,17.75 -169.7,17.75 ccw(c-169.7,17.3) -170.149,17.3 -170.149,16.4 ccw(c-169.7,16.4) -169.7,15.95 -168.199,15.95 ccw(c-168.199,16.4) -167.749,16.4 -167.749,17.027 cw(c-167.25,17.027) -167.603,17.38 -167.55,17.434 -167.34,17.643 cw(c-165.951,16.256) -167.339,17.644 cw(c-165.951,16.256) -165.951,18.219 -157.793,18.219 ccw(c-157.793,20.882) -155.912,18.997 ; C404.2@-171.709,77.653 LED404.1@-168.949,77.653 ; LED404.1@-168.949,77.65 LED404.1@-168.949,77.653 ; -155.911,18.997 -155.457,19.452 -154.097,20.812 cw(c-152.386,19.104) -152.386,21.521 -125.073,21.521 cw(c-125.073,20.152) C410.2@-123.703,20.152 -120.949,20.152 LED410.1@-120.949,20.15 -120.949,17.841 cw(c-121.237,18.25) -120.953,17.839 cw(c-121.237,18.25) -121.237,17.75 -121.7,17.75 ccw(c-121.7,17.3) -122.149,17.3 -122.149,16.4 ccw(c-121.7,16.4) -121.7,15.95 -120.199,15.95 ccw(c-120.199,16.4) -119.749,16.4 -119.749,17.027 cw(c-119.249,17.027) -119.603,17.38 -119.522,17.461 cw(c-118.134,16.073) -118.134,18.036 -111.929,18.036 ccw(c-111.929,21.153) -109.723,18.95 -108.596,20.077 -107.728,20.945 cw(c-106.339,19.558) -106.339,21.521 -77.067,21.521 cw(c-77.067,20.152) C411.2@-75.697,20.152 -72.949,20.152 LED411.1@-72.949,20.15 -72.949,17.968 cw(c-73.362,18.25) -73.362,17.75 -73.699,17.75 ccw(c-73.699,17.3) -74.149,17.3 -74.149,16.4 ccw(c-73.699,16.4) -73.699,15.95 -72.199,15.95 ccw(c-72.199,16.4) -71.749,16.4 -71.749,17.027 cw(c-71.249,17.027) -71.603,17.38 -71.395,17.588 cw(c-70.007,16.2) -70.007,18.163 -64.939,18.163 ccw(c-64.939,21.28) -62.733,19.077 -62.551,19.26 -60.356,21.454 cw(c-58.968,20.066) -58.968,22.029 -29.443,22.029 cw(c-29.443,20.15) C412.2@-27.564,20.152 -24.95,20.152 LED412.1@-24.95,20.15 ccw(c-23.469,20.15) -23.469,18.669 -11.049,18.669 ccw(c-11.049,21.209) -8.509,21.209 -8.509,37.719 ; C411.2@-75.45,19.963 C411.2@-75.45,20.15 ; LED402.1@-72.949,77.65 ccw(c-73,77.65) -73,77.7 -111.58,77.7 cw(c-111.58,79.759) -113.035,78.303 -113.308,78.575 ccw(c-115.104,76.779) -115.104,79.319 -119.28,79.319 ccw(c-119.28,77.65) LED403.1@-120.949,77.65 -159.463,77.65 cw(c-159.463,80.19) -161.259,78.394 -161.568,78.702 ccw(c-163.364,76.906) -163.364,79.446 -167.153,79.446 ccw(c-167.153,77.65) LED404.1@-168.949,77.653 ; Q301.2@-35.048,75.155 cw(c-32.553,75.155) -32.553,77.65 LED401.1@-24.95,77.65 cw(c-23.86,77.65) -23.86,78.74 -16.876,78.74 cw(c-16.876,77.612) R306.1@-15.748,77.612 -11.049,77.612 cw(c-11.049,75.072) -8.509,75.072 -8.509,37.719 ; R402.2@-15,37.846 -8.636,37.846 cw(c-8.636,37.719) -8.509,37.719
VCC3V3: C301.2 C302.2 C303.2 C304.2 C305.2 C308.2 CON302.1 CON303.2 R303.1 S301.1 U301.1 U301.9 U301.24 U301.36 U301.48 U304.2 | length 132
  Component Side w0.254: v1(-61.468,60.833) -60.615,60.833 cw(c-60.615,60.782) C304.2@-60.579,60.818 -58.363,60.818 U301.48@-57.918,60.373 ; v1(-60.706,56.642) ccw(c-60.742,56.678) -60.691,56.678 C305.2@-60.691,57.658 -59.436,57.658 ccw(c-59.436,59.805) U301.1@-57.918,58.287 ; v1(-56.134,51.689) ccw(c-56.17,51.725) -56.119,51.725 C302.2@-56.119,52.705 -55.846,52.978 -55.846,54.155 cw(c-54.555,54.155) U301.9@-55.469,55.067 ; U301.9@-55.468,55.068 -55.09,55.446 U301.9@-55.09,55.459 ; v1(-52.197,66.436) ccw(c-52.161,66.472) -52.161,66.421 C303.2@-51.181,66.421 -51.181,66.071 cw(c-52.482,66.071) -51.273,65.591 cw(c-51.508,65.686) -51.34,65.496 ccw(c-50.927,65.024) -51.554,65.016 -51.554,64.679 ccw(c-51.3,64.681) -51.552,64.653 U301.36@-51.943,64.262 ; C301.2@-44.442,57.511 cw(c-42.829,57.785) C301.2@-44.465,57.785 -46.842,57.785 cw(c-46.842,59.499) U301.24@-48.054,58.287 ccw(c-47.407,58.934) -47.407,58.019 -44.465,58.019 -44.442,58.019 ccw(c-42.829,58.293) -42.829,56.657 R303.1@-40.132,56.657 -40.132,57.023 cw(c-39.243,57.023) -39.243,57.912 -38.735,57.912 ccw(c-38.735,58.801) CON302.1@-37.846,58.801 ; CON303.2@-28.067,51.816 cw(c-28.067,51.211) -27.462,51.211 S301.1@-27.462,49.482 S301.1@-27.462,43.482
  Component Side w0.5: C301.2@-44.465,58.019 v3(-44.465,58.801) -44.465,60.549 cw(c-42.545,60.549) -42.545,62.469 -40.427,62.469 cw(c-40.427,61.969) -40.205,62.417 -40.148,62.389 cw(c-40.37,61.941) -40.038,62.314 ccw(c-39.537,62.873) -38.838,62.603 cw(c-38.371,62.423) -38.373,62.923 -30.226,62.923 ccw(c-30.226,65.463) -27.686,65.463 -27.686,70.951 ccw(c-30.226,70.951) -30.226,73.491 -30.8,73.491 U304.2@-30.8,75.197
  Bottom Layer w0.254: v1(-38.862,57.912) ccw(c-37.465,57.912) -37.465,56.515 -30.607,56.515 cw(c-30.607,53.975) -28.067,53.975 CON303.2@-28.067,51.816
  Bottom Layer w0.5: v1(-52.197,66.436) -58.928,66.436 ccw(c-58.928,63.896) -61.468,63.896 v1(-61.468,60.833) -61.468,58.456 ccw(c-58.928,58.456) -60.724,56.66 v1(-60.706,56.642) -60.033,55.969 ccw(c-58.237,57.765) -59.036,55.354 ccw(c-58.237,57.765) -58.237,55.225 -56.652,55.225 ccw(c-56.654,55.725) -56.599,55.228 cw(c-56.515,54.483) -55.987,53.95 ccw(c-55.634,53.596) -56.134,53.598 v1(-56.134,51.689) -54.61,51.689 ccw(c-54.61,52.578) -53.721,52.578 -53.721,53.177 cw(c-51.181,53.177) -52.977,54.973 -49.893,58.057 cw(c-48.097,56.261) -48.097,58.801 ccw(c-47.857,59.24) -47.859,58.74 -46.462,58.74 cw(c-46.463,58.24) -46.319,58.719 ccw(c-46.101,59.436) -45.786,58.755 cw(c-45.577,58.301) -45.579,58.801 v3(-44.465,58.801)
pads on no net: CON301. CON301.A8 CON301.B8 CON302.0 CON302.6 D301.1 D301.6 D413. FID1.0 FID2.0 FID3.0 FID4.0 LED412.2 S201. S202. S203. S204. S205. S206. S207. S208. S209. S210. S211. S212. S213. S214. S215. S216. S217. S218. S219. S220. S221. S222. S223. S224. S225. S226. S227. S228. S229. S230. S231. S232. S233. S234. S235. S236. S237. S238. S239. S240. S241. S242. S243. S244. S245. S246. S247. S248. S249. S250. S251. S252. S253. S254. S255. S256. S257. S258. S259. S260. S261. S262. S263. S264.

## Polygon pours and split planes (outlines as drawn)
GND on Bottom Layer "Component Side-No Net" (hatched 45Degree grid 1.397 track 0.203, remove dead copper, pour order 0): -0.635,93.995 -0.635,0.65 -284.48,0.65 -284.48,93.995
GND on Component Side "Component Side-No Net" (hatched 45Degree grid 1.397 track 0.203, remove dead copper, pour order 2): -0.635,93.995 -0.635,0.65 -284.48,0.65 -284.48,93.995

## Other copper
Component Side:
  pour cut-out: -241.8,36.39 cw(c-241.8,37.79) -241.8,39.19 -43.18,39.19 cw(c-43.18,37.79) -41.78,37.79 cw(c-43.18,37.79) -43.18,36.39
Bottom Layer:
  pour cut-out: -241.8,36.39 cw(c-241.8,37.79) -241.8,39.19 -43.18,39.19 cw(c-43.18,37.79) -41.78,37.79 cw(c-43.18,37.79) -43.18,36.39

## Silkscreen, mask and mechanical layers (free items; w line width, h text height)
Top Overlay:
  circle w0.4: c-261.58,28.385 r0.75
  circle w0.4: c-142.499,9.215 r0.75
  circle w0.4: c-218.699,9.215 r0.75
  circle w0.4: c-271.087,9.215 r0.75
  circle w0.4: c-244.893,9.215 r0.75
  circle w0.4: c-66.299,9.215 r0.75
  circle w0.4: c-40.106,9.215 r0.75
  circle w0.4: c-13.912,9.215 r0.75
  circle w0.4: c-228.225,28.265 r0.75
  circle w0.4: c-209.175,28.265 r0.75
  circle w0.4: c-190.125,28.265 r0.75
  circle w0.4: c-256.8,47.315 r0.75
  circle w0.4: c-275.861,56.845 r0.75
  circle w0.4: c-218.7,47.315 r0.75
  circle w0.4: c-237.75,47.315 r0.75
  circle w0.4: c-268.692,85.415 r0.75
  circle w0.4: c-242.512,85.415 r0.75
  circle w0.4: c-223.462,85.415 r0.75
  circle w0.4: c-252.037,66.365 r0.75
  circle w0.4: c-232.987,66.365 r0.75
  circle w0.4: c-213.937,66.365 r0.75
  circle w0.4: c-204.412,85.415 r0.75
  circle w0.4: c-185.42,85.415 r0.75
  circle w0.4: c-194.887,66.365 r0.75
  circle w0.4: c-175.837,66.365 r0.75
  circle w0.4: c-166.312,85.415 r0.75
  circle w0.4: c-156.787,66.365 r0.75
  circle w0.4: c-147.262,85.415 r0.75
  circle w0.4: c-128.212,85.415 r0.75
  circle w0.4: c-137.737,66.365 r0.75
  circle w0.4: c-118.687,66.365 r0.75
  circle w0.4: c-109.162,85.415 r0.75
  circle w0.4: c-99.637,66.365 r0.75
  circle w0.4: c-90.112,85.415 r0.75
  circle w0.4: c-71.062,85.415 r0.75
  circle w0.4: c-61.537,66.365 r0.75
  circle w0.4: c-52.012,85.415 r0.75
  circle w0.4: c-42.487,66.365 r0.75
  circle w0.4: c-16.293,66.365 r0.75
  circle w0.4: c-11.531,85.415 r0.75
  circle w0.4: c-32.962,85.415 r0.75
  circle w0.4: c-18.675,47.315 r0.75
  circle w0.4: c-80.587,66.365 r0.75
  circle w0.4: c-47.25,47.315 r0.75
  circle w0.4: c-66.3,47.315 r0.75
  circle w0.4: c-85.35,47.315 r0.75
  circle w0.4: c-37.725,28.265 r0.75
  circle w0.4: c-13.912,28.265 r0.75
  circle w0.4: c-56.775,28.265 r0.75
  circle w0.4: c-75.825,28.265 r0.75
  circle w0.4: c-94.875,28.265 r0.75
  circle w0.4: c-113.925,28.265 r0.75
  circle w0.4: c-123.45,47.315 r0.75
  circle w0.4: c-104.4,47.315 r0.75
  circle w0.4: c-132.975,28.265 r0.75
  circle w0.4: c-142.5,47.315 r0.75
  circle w0.4: c-152.025,28.265 r0.75
  circle w0.4: c-171.075,28.265 r0.75
  circle w0.4: c-180.6,47.315 r0.75
  circle w0.4: c-161.55,47.315 r0.75
  circle w0.4: c-199.65,47.315 r0.75
  lines w0.2: -93.472,82.677 -67.31,82.677 ; -87.585,85.415 -85.217,85.415 ; -75.747,85.415 -73.379,85.415 ; -88.292,85.415 -87.585,86.122 -87.585,84.708 -88.292,85.415 ; -73.379,84.708 -72.672,85.415 -73.379,86.122 -73.379,84.708
  lines w0.254: -153.924,17.033 -153.924,23.241 -131.699,23.241 -131.699,17.033 -153.924,17.033
  text "Circles show original AEK ISO layout" at -93.345,83.181 h0.75
  text "+" at -18.034,44.377 h1.2 r270
  text "-" at -20.374,43.415 h1.2
  text "RESET" at -31.115,41.656 h0.75
  text "AEKISO60" at -152.273,19.304 h5
  text "Rev B2" at -152.781,17.78 h2
  text "by 4pplet" at -140.843,17.78 h2
Bottom Overlay:
  circle w0.4: c-132.975,28.265 r0.75
  circle w0.4: c-56.775,28.265 r0.75
  circle w0.4: c-75.825,28.265 r0.75
  circle w0.4: c-104.4,47.315 r0.75
  circle w0.4: c-123.45,47.315 r0.75
  circle w0.4: c-199.65,47.315 r0.75
  circle w0.4: c-152.025,28.265 r0.75
  circle w0.4: c-142.5,47.315 r0.75
  circle w0.4: c-161.55,47.315 r0.75
  circle w0.4: c-180.6,47.315 r0.75
  circle w0.4: c-113.925,28.265 r0.75
  circle w0.4: c-171.075,28.265 r0.75
  circle w0.4: c-94.875,28.265 r0.75
  circle w0.4: c-11.531,85.415 r0.75
  circle w0.4: c-18.675,47.315 r0.75
  circle w0.4: c-32.962,85.415 r0.75
  circle w0.4: c-137.737,66.365 r0.75
  circle w0.4: c-66.3,47.315 r0.75
  circle w0.4: c-47.25,47.315 r0.75
  circle w0.4: c-37.725,28.265 r0.75
  circle w0.4: c-85.35,47.315 r0.75
  circle w0.4: c-13.912,28.265 r0.75
  circle w0.4: c-261.58,28.385 r0.75
  circle w0.4: c-142.499,9.215 r0.75
  circle w0.4: c-128.212,85.415 r0.75
  circle w0.4: c-194.887,66.365 r0.75
  circle w0.4: c-175.837,66.365 r0.75
  circle w0.4: c-156.787,66.365 r0.75
  circle w0.4: c-147.262,85.415 r0.75
  circle w0.4: c-166.312,85.415 r0.75
  circle w0.4: c-218.7,47.315 r0.75
  circle w0.4: c-218.699,9.215 r0.75
  circle w0.4: c-190.125,28.265 r0.75
  circle w0.4: c-271.087,9.215 r0.75
  circle w0.4: c-256.8,47.315 r0.75
  circle w0.4: c-237.75,47.315 r0.75
  circle w0.4: c-275.861,56.845 r0.75
  circle w0.4: c-244.893,9.215 r0.75
  circle w0.4: c-228.225,28.265 r0.75
  circle w0.4: c-209.175,28.265 r0.75
  circle w0.4: c-66.299,9.215 r0.75
  circle w0.4: c-40.106,9.215 r0.75
  circle w0.4: c-13.912,9.215 r0.75
  circle w0.4: c-213.937,66.365 r0.75
  circle w0.4: c-185.42,85.415 r0.75
  circle w0.4: c-204.412,85.415 r0.75
  circle w0.4: c-232.987,66.365 r0.75
  circle w0.4: c-268.692,85.415 r0.75
  circle w0.4: c-252.037,66.365 r0.75
  circle w0.4: c-242.512,85.415 r0.75
  circle w0.4: c-223.462,85.415 r0.75
  circle w0.4: c-80.587,66.365 r0.75
  circle w0.4: c-109.162,85.415 r0.75
  circle w0.4: c-71.062,85.415 r0.75
  circle w0.4: c-118.687,66.365 r0.75
  circle w0.4: c-16.293,66.365 r0.75
  circle w0.4: c-52.012,85.415 r0.75
  circle w0.4: c-42.487,66.365 r0.75
  circle w0.4: c-61.537,66.365 r0.75
  circle w0.4: c-90.112,85.415 r0.75
  circle w0.4: c-99.637,66.365 r0.75
outline:
  lines w0.1: -284.861,36.576 -280.67,36.576 ccw(c-280.67,37.719) -279.527,37.719 ; -284.85,36.565 -284.85,2.215 ccw(c-282.85,2.215) -282.85,0.215 -275.85,0.215 cw(c-272.7,-0.52) -269.55,0.215 -236.137,0.215 cw(c-232.987,-0.52) -229.838,0.215 -189.05,0.215 cw(c-185.9,-0.52) -182.75,0.215 -102.25,0.215 cw(c-99.1,-0.52) -95.95,0.215 -55.161,0.215 cw(c-52.011,-0.52) -48.861,0.215 -15.45,0.215 cw(c-12.3,-0.52) -9.15,0.215 -2.15,0.215 ccw(c-2.15,2.215) -0.15,2.215 ccw(c-0.15,2.238) -0.127,2.238 -0.127,36.576 -4.191,36.576 cw(c-4.191,37.846) -5.461,37.846 cw(c-4.242,37.846) -4.242,39.065 -0.15,39.065 -0.15,92.415 ccw(c-2.15,92.415) -2.15,94.415 -7.15,94.415 ; -279.527,37.795 ccw(c-280.797,37.795) -280.797,39.065 -284.85,39.065 -284.85,92.415 cw(c-282.85,92.415) -282.85,94.415 -275.85,94.415 ccw(c-272.7,95.149) -269.55,94.415 -250.424,94.415 ccw(c-247.274,95.149) -244.124,94.415 -189.05,94.415 ccw(c-185.9,95.149) -182.75,94.415 -131.361,94.415 ccw(c-128.211,95.149) -125.061,94.415 -102.25,94.415 ccw(c-99.1,95.149) -95.95,94.415 -40.874,94.415 ccw(c-37.724,95.149) -34.574,94.415 -13.477,94.415 ccw(c-10.327,95.149) -7.177,94.415
  lines w0.2: -279.527,37.719 -279.527,37.795
Mechanical 14:
  circle w0.5: c0,0 r0.2
Mechanical 16:
  drawing of 561 lines, arcs and shapes, not listed

## Dimensions
-0.15,92.415 to -284.85,92.415 on top dimensions
-9.15,0.215 to -7.177,94.415 on top dimensions
-0.15,92.415 to -284.85,92.415 on bot dimensions
-9.15,0.215 to -2.15,94.415 on bot dimensions

## Text inside footprints (layer, text, board x,y; h text height)
CON301: Mechanical 15 "connector edge" at -15.25,95.25 h1 r180
S260: Mechanical 16 "7U" at -208.331,7.365 h1.52 r270